# EAGLE board central (EAGLE 9.2.1)
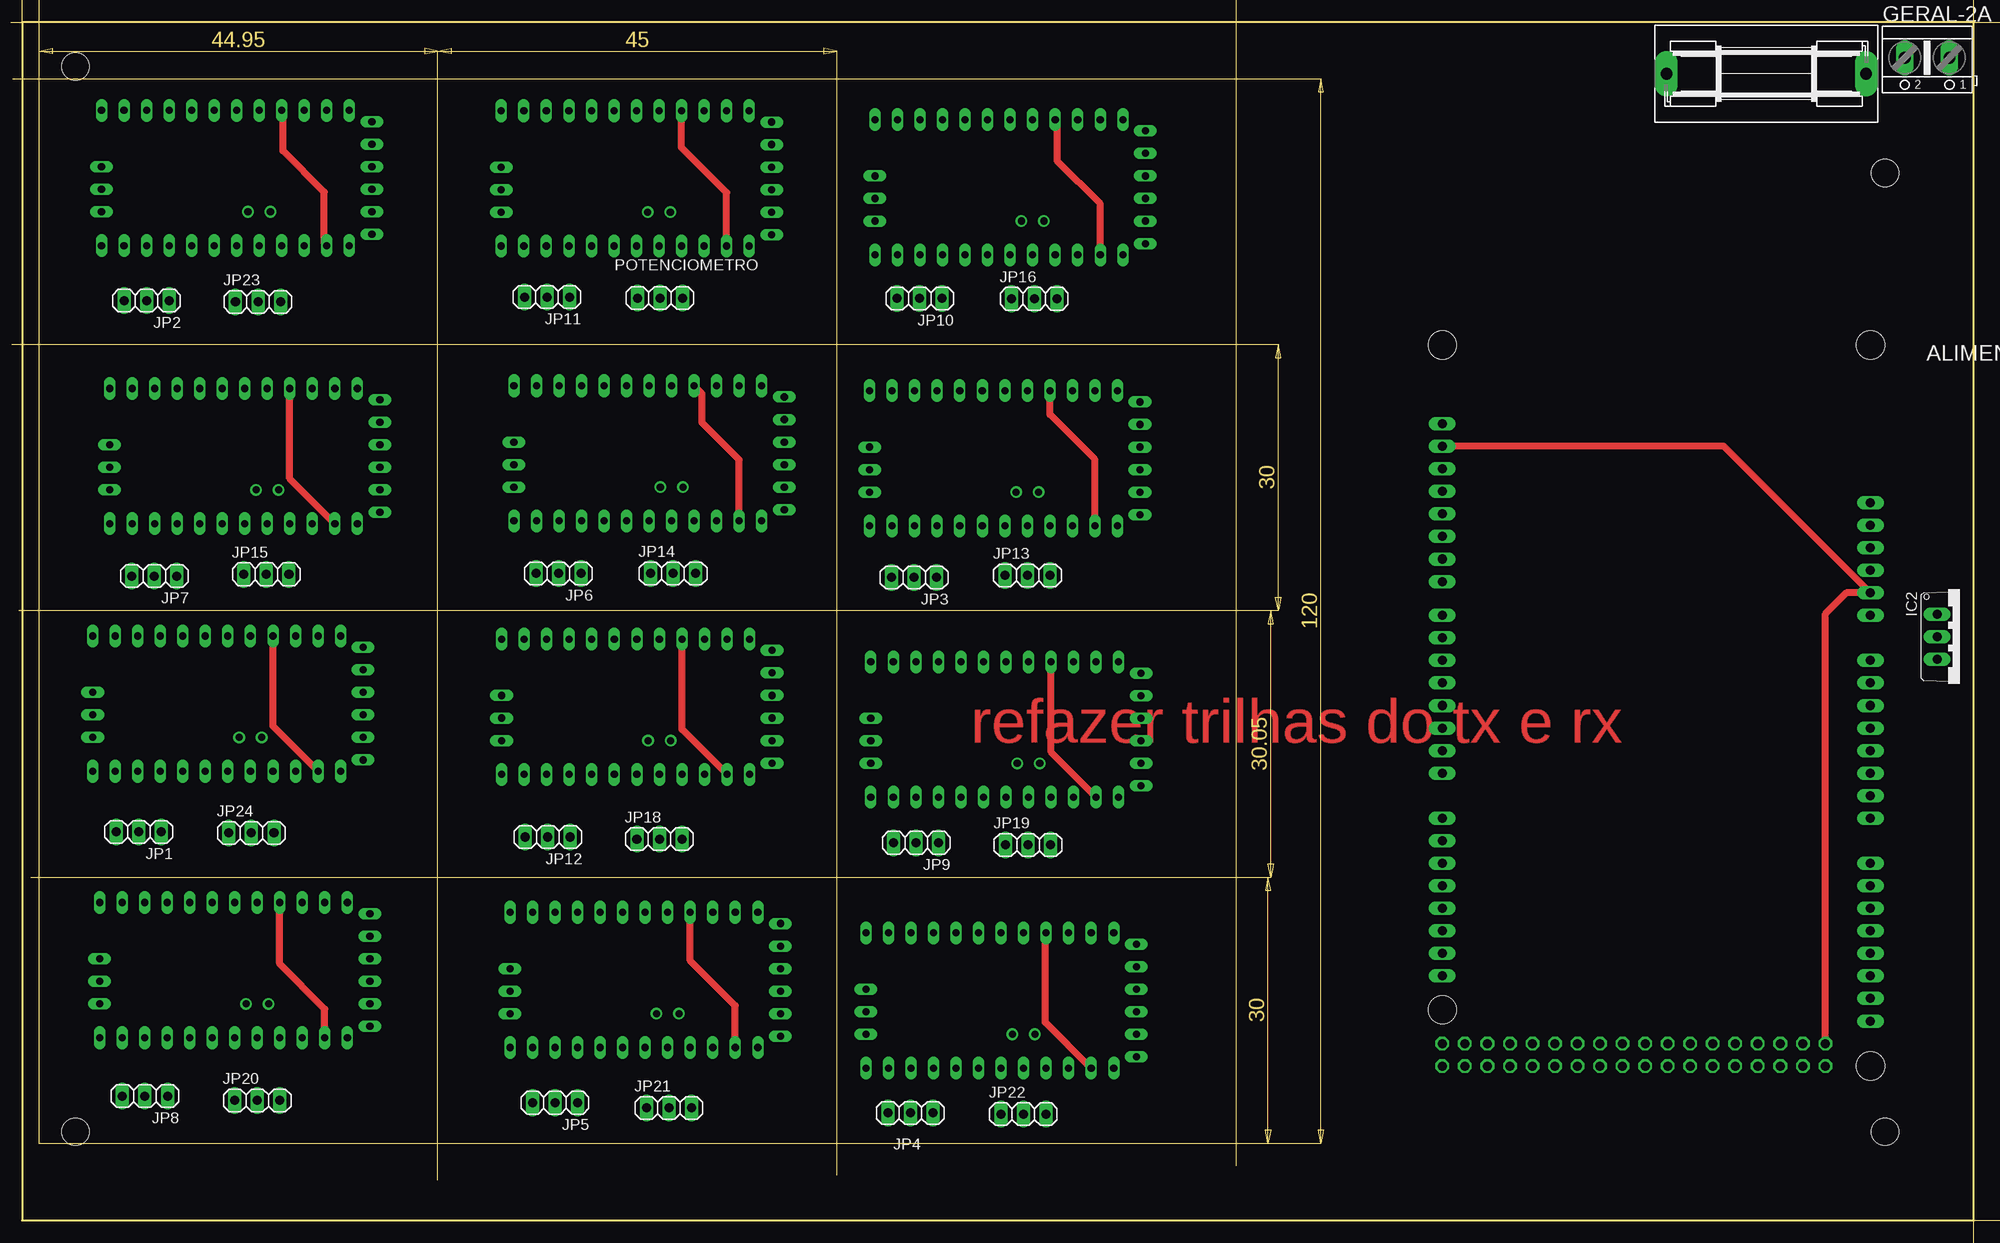
[diagram p0: board, top side]
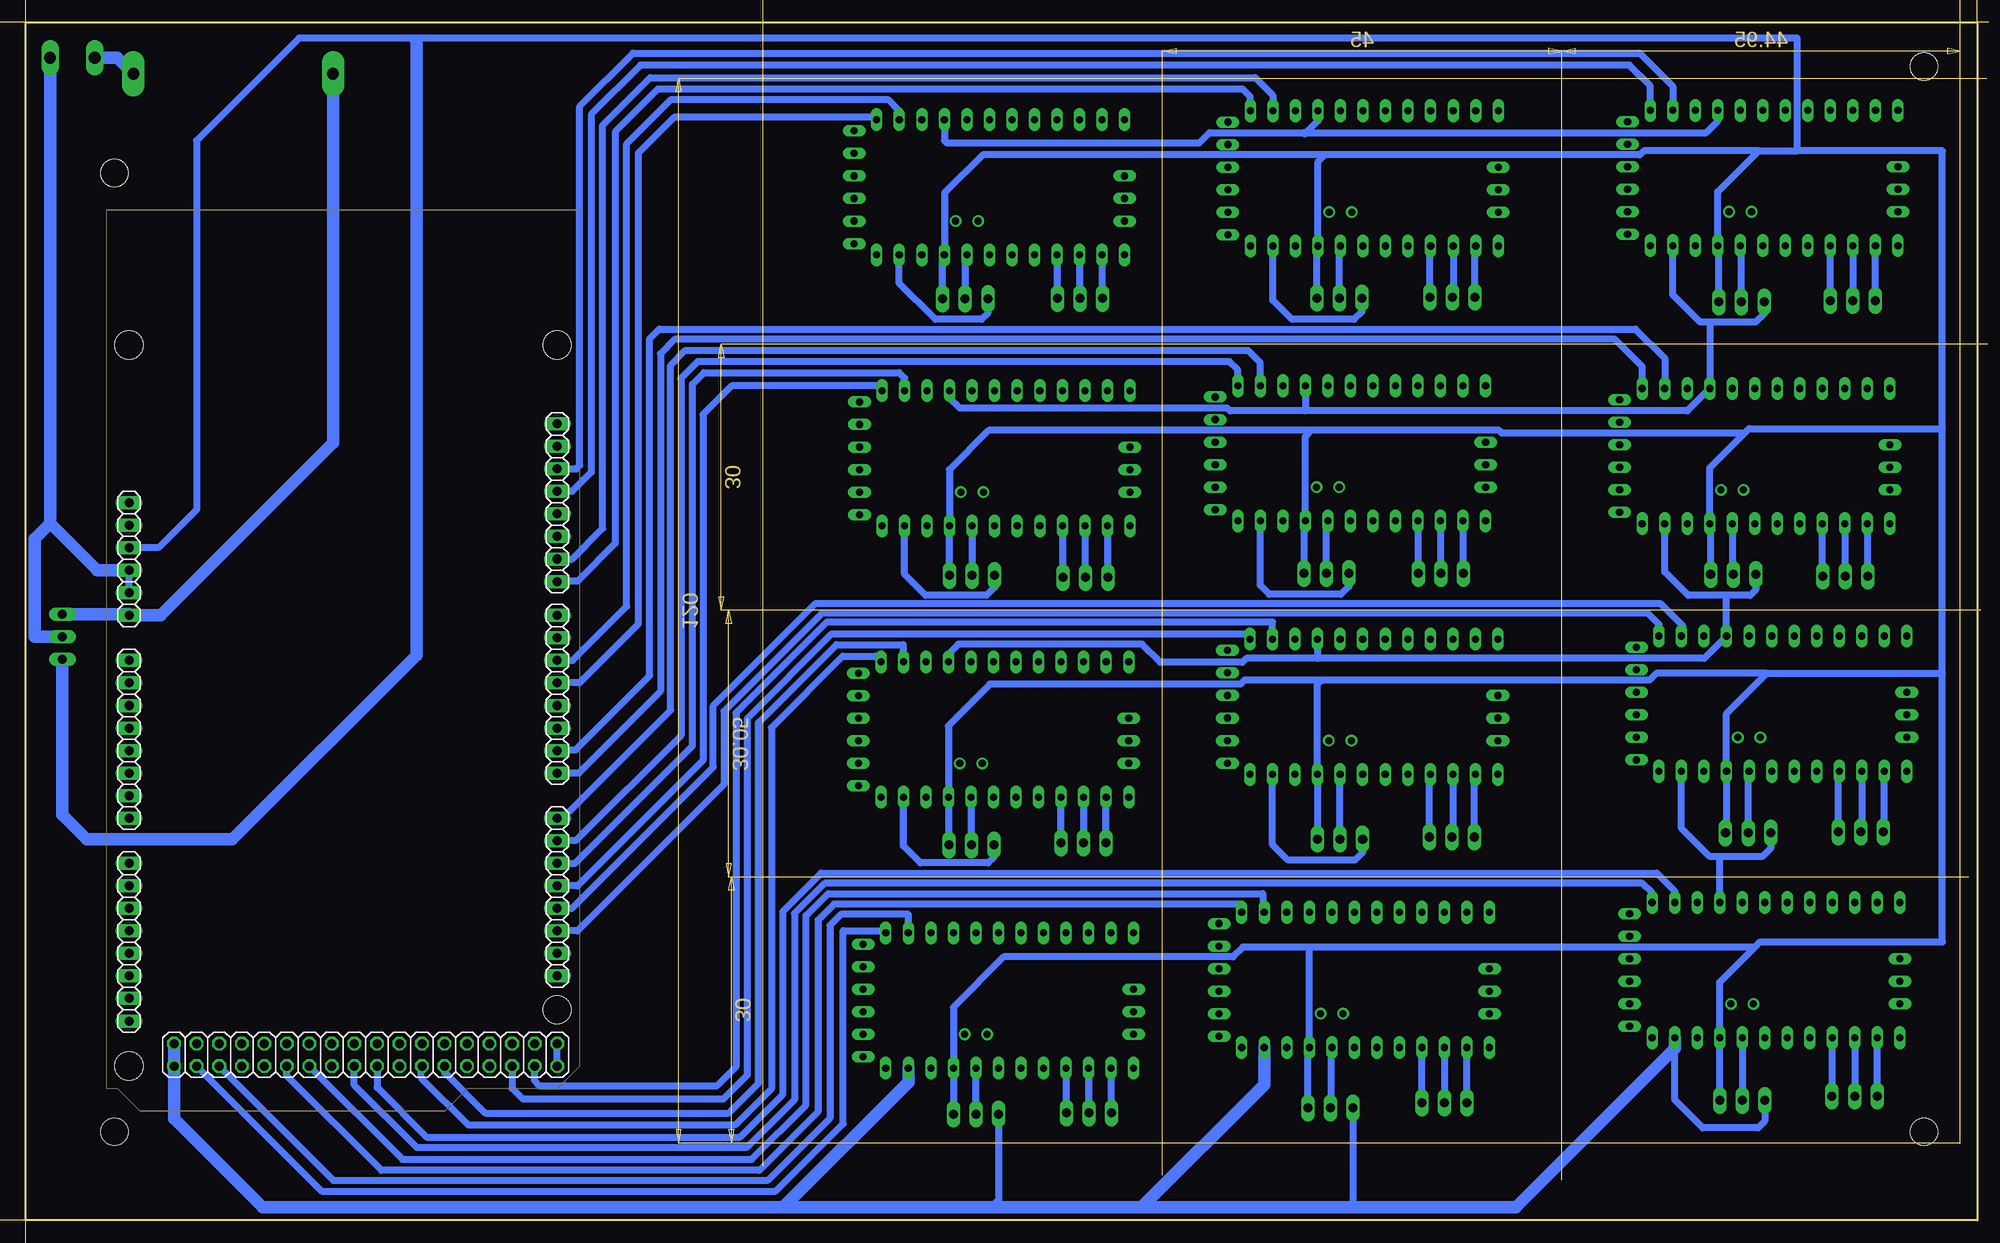
[diagram p1: board, bottom side, seen from below]

Size 220 x 135.05 mm. Coordinates in mm from the lower left corner, seen from the top.
Outline: 0,0 220,0 220,135.05 0,135.05 0,0
Copper layers (1*16): Top 0.035mm / dielectric 1.5mm / Bottom 0.035mm
Design rules "default": minimum track width 6mil, minimum drill 0.35mm, track to track 6mil, track to pad 6mil, pad to pad 6mil, via to via 6mil, smd to smd 6mil, copper to edge 40mil, drill to drill 6mil, minimum pad ring 10mil, minimum via ring 8mil, stop-mask expansion 4mil, vias tented up to drill 0mil, thermal gap 10mil
Holes 3.1 mm at 210,118.05 6,130.05 210,10 6,10
vRestrict: area 225.4,0 to 226,1.5; area 225.4,8.5 to 226,10; area 223.5,3.6 to 225.3,6.4; area 0,-2.6 to 1.5,-2; area 4.5,-2.6 to 6,-2; area 2.3,-1.9 to 3.7,-0.1; area 218.5,-6.5 to 220,-5.9; area 210,-6.5 to 211.5,-5.9; area 213.6,-8.4 to 216.4,-6.6; area 223.5,133.6 to 224.2,135.1; area 223.5,118 to 224.2,119.5; area 224.2,125.2 to 226,127.9; 3 more areas; 15 lines
Milling: area 1.9,147.9 to 3.4,148.6; area 135.4,147.9 to 136.9,148.6; area 67.3,148.7 to 71.5,150.4; area 146.1,8.7 to 146.7,10.2; area 146.1,127.2 to 146.7,128.7; area 144.2,66.6 to 146,70.8; area 1.9,131.5 to 3.4,132.1; area 45.4,131.5 to 46.9,132.1; area 20.9,132.2 to 27.8,134; area 46.9,131.5 to 48.4,132.1; area 90.4,131.5 to 91.9,132.1; area 68,132.2 to 70.7,134; 15 more areas; 27 lines

## Footprints (pad centres in the part's own frame; a part is rotated, then mirrored left to right if it is on the bottom)
AK500/2 = drill 1.321 long: 1 -2.515,0; 2 2.515,0
SH22,5A = drill 1.321 pad 2.54 long: 1 -11.252,0; 2 11.252,0
MEGA_ARDUINO_2 = drill 1.016 long: 1 33.02,2.54; 2 35.56,2.54; 3 38.1,2.54; 4 40.64,2.54; 5 43.18,2.54; 6 45.72,2.54; 7 50.8,2.54; 8 53.34,2.54; 9 55.88,2.54; 10 58.42,2.54; 11 60.96,2.54; 12 63.5,2.54; 13 66.04,2.54; 14 68.58,2.54; 15 73.66,2.54; 16 76.2,2.54; 17 78.74,2.54; 18 81.28,2.54; 19 83.82,2.54; 20 86.36,2.54; 21 88.9,2.54; 22 91.44,2.54; 23 86.36,50.8; 24 83.82,50.8; 25 81.28,50.8; 26 78.74,50.8; 27 76.2,50.8; 28 73.66,50.8; 29 71.12,50.8; 30 68.58,50.8; 31 63.5,50.8; 32 60.96,50.8; 33 58.42,50.8; 34 55.88,50.8; 35 53.34,50.8; 36 50.8,50.8; 37 48.26,50.8; 38 45.72,50.8; 39 41.91,50.8; 40 39.37,50.8; 41 36.83,50.8; 42 34.29,50.8; 43 31.75,50.8; 44 29.21,50.8; 45 26.67,50.8; 46 24.13,50.8 | drill 1.016 octagon: 47 93.98,50.8; 48 96.52,50.8; 49 93.98,48.26; 50 96.52,48.26; 51 93.98,45.72; 52 96.52,45.72; 53 93.98,43.18; 54 96.52,43.18; 55 93.98,40.64; 56 96.52,40.64; 57 93.98,38.1; 58 96.52,38.1; 59 93.98,35.56; 60 96.52,35.56; 61 93.98,33.02; 62 96.52,33.02; 63 93.98,30.48; 64 96.52,30.48; 65 93.98,27.94; 66 96.52,27.94; 67 93.98,25.4; 68 96.52,25.4; 69 93.98,22.86; 70 96.52,22.86; 71 93.98,20.32; 72 96.52,20.32; 73 93.98,17.78; 74 96.52,17.78; 75 93.98,15.24; 76 96.52,15.24; 77 93.98,12.7; 78 96.52,12.7; 79 93.98,10.16; 80 96.52,10.16; 81 93.98,7.62; 82 96.52,7.62 | hole 3.2: 15.24,50.8; 15.24,2.54; 90.17,50.8; 96.52,2.54
TO220V = drill 1.016 long: 1 -2.54,-2.54; 2 0,-2.54; 3 2.54,-2.54
1X03 = drill 1.016 long: 1 -2.54,0; 2 0,0; 3 2.54,0
ABK-PRO-MINI = drill 0.8 long: A0 10.16,-3.81; A1 10.16,-6.35; A2 10.16,-8.89; A3 10.16,-11.43; A6 3.81,-21.59; A7 6.35,-21.59; D2 -5.08,-3.81; D3 -5.08,-6.35; D4 -5.08,-8.89; D5 -5.08,-11.43; D6 -5.08,-13.97; D7 -5.08,-16.51; D8 -5.08,-19.05; D9 -5.08,-21.59; D10 10.16,-21.59; D11 10.16,-19.05; D12 10.16,-16.51; D13 10.16,-13.97; DTR 8.89,8.89; GND 10.16,3.81; GND1 -5.08,-1.27; GND2 -3.81,8.89; GND3 -1.27,8.89; GND4 1.27,-21.59; RAW 10.16,6.35; RST 10.16,1.27; RST1 -5.08,1.27; RX1 -5.08,3.81; RX1-1 3.81,8.89; TX0 -5.08,6.35; TX0-1 6.35,8.89; VCC 10.16,-1.27; VCC1 1.27,8.89 | drill 0.8: A4 6.35,-5.08; A5 6.35,-2.54

## Placement (x,y rotation side)
ALIMENTACAO  [AK500/2]  214.74,131.04 180 top
GERAL-2A  [SH22,5A]  196.61,129.24 180 top
IC1  [MEGA_ARDUINO_2]  210.89,113.92 270 bottom
IC2  7805TV  [TO220V]  218.4,65.8 270 top
JP1  [1X03]  13.14,43.8 180 top
JP2  [1X03]  14.02,103.66 180 top
JP3  [1X03]  100.54,72.48 180 top
JP4  [1X03]  100.13,12.12 180 top
JP5  [1X03]  60.07,13.27 180 top
JP6  [1X03]  60.46,72.92 180 top
JP7  [1X03]  14.9,72.62 180 top
JP8  [1X03]  13.84,14.02 180 top
JP9  [1X03]  100.78,42.57 180 top
JP10  [1X03]  101.17,103.92 180 top
JP11  [1X03]  59.16,104.07 180 top
JP12  [1X03]  59.25,43.22 180 top
JP13  [1X03]  113.33,72.71 0 top
JP14  [1X03]  73.37,72.93 0 top
JP15  [1X03]  27.53,72.83 0 top
JP16  [1X03]  114.09,103.88 0 top
JP18  [1X03]  71.83,42.98 0 top
JP19  [1X03]  113.39,42.33 0 top
JP20  [1X03]  26.5,13.53 0 top
JP21  [1X03]  72.91,12.68 0 top
JP22  [1X03]  112.87,11.98 0 top
JP23  [1X03]  26.58,103.53 0 top
JP24  [1X03]  25.84,43.68 0 top
POTENCIOMETRO  [1X03]  71.9,103.96 0 top
U$1  ABK-PRO-MINI  [ABK-PRO-MINI]  29.54,60.79 270 top
U$2  ABK-PRO-MINI  [ABK-PRO-MINI]  30.53,120.03 270 top
U$3  ABK-PRO-MINI  [ABK-PRO-MINI]  77.02,89 270 top
U$4  ABK-PRO-MINI  [ABK-PRO-MINI]  76.58,29.66 270 top
U$5  ABK-PRO-MINI  [ABK-PRO-MINI]  31.44,88.69 270 top
U$6  ABK-PRO-MINI  [ABK-PRO-MINI]  30.31,30.76 270 top
U$7  ABK-PRO-MINI  [ABK-PRO-MINI]  117.12,88.44 270 top
U$8  ABK-PRO-MINI  [ABK-PRO-MINI]  116.7,27.34 270 top
U$9  ABK-PRO-MINI  [ABK-PRO-MINI]  117.72,118.99 270 top
U$10  ABK-PRO-MINI  [ABK-PRO-MINI]  117.25,57.87 270 top
U$11  ABK-PRO-MINI  [ABK-PRO-MINI]  75.6,119.99 270 top
U$12  ABK-PRO-MINI  [ABK-PRO-MINI]  75.64,60.44 270 top

## Library data of the parts
ALIMENTACAO = con-ptr500; OC_FARNELL: unknown; OC_NEWARK: unknown
GERAL-2A = fuse; MPN: 0031.7701.11; OC_FARNELL: unknown; OC_NEWARK: 04F1224
IC1 = arduino
IC2 = linear
JP1-JP16 JP18-JP24 POTENCIOMETRO = pinhead
U$1-U$12 = arduino1

## Nets
+3V3: IC1.2
+5V: IC1.47 IC1.48
GND: ALIMENTACAO.1 IC1.4 IC1.5 IC1.45 IC1.81 IC1.82 IC2.2 JP13.1 JP14.1 JP15.1 JP16.1 JP18.1 JP19.1 JP20.1 JP21.1 JP22.1 JP23.1 JP24.1 POTENCIOMETRO.1 U$1.GND U$1.GND1 U$2.GND U$2.GND1 U$3.GND U$3.GND1 U$4.GND U$4.GND1 U$5.GND U$5.GND1 U$6.GND U$6.GND1 U$7.GND U$7.GND1 U$8.GND U$8.GND1 U$9.GND U$9.GND1 U$10.GND U$10.GND1 U$11.GND U$11.GND1 U$12.GND U$12.GND1
N$1: JP1.1 U$1.D13
N$2: JP1.2 U$1.D12
N$3: JP1.3 U$1.D11
N$4: JP3.1 U$7.D13
N$5: JP3.2 U$7.D12
N$6: JP3.3 U$7.D11
N$7: JP6.1 U$3.D13
N$8: JP6.2 U$3.D12
N$9: JP6.3 U$3.D11
N$10: JP7.1 U$5.D13
N$11: JP7.2 U$5.D12
N$12: JP7.3 U$5.D11
N$13: JP10.1 U$9.D13
N$14: JP10.2 U$9.D12
N$15: JP10.3 U$9.D11
N$16: JP11.1 U$11.D13
N$17: JP11.2 U$11.D12
N$18: JP11.3 U$11.D11
N$19: JP12.1 U$12.D13
N$20: JP12.2 U$12.D12
N$21: JP12.3 U$12.D11
N$22: JP9.1 U$10.D13
N$23: JP9.2 U$10.D12
N$24: JP9.3 U$10.D11
N$25: JP8.1 U$6.D13
N$26: JP8.2 U$6.D12
N$27: JP8.3 U$6.D11
N$28: JP5.1 U$4.D13
N$29: JP5.2 U$4.D12
N$30: JP5.3 U$4.D11
N$31: JP4.1 U$8.D13
N$32: JP4.2 U$8.D12
N$33: JP4.3 U$8.D11
N$34: JP2.1 U$2.D13
N$35: JP2.2 U$2.D12
N$36: JP2.3 U$2.D11
N$37: JP13.2 U$7.A0
N$38: JP24.2 U$1.A0
N$39: JP14.2 U$3.A0
N$40: JP15.2 U$5.A0
N$41: JP16.2 U$9.A0
N$42: POTENCIOMETRO.2 U$11.A0
N$43: JP18.2 U$12.A0
N$44: JP19.2 U$10.A0
N$45: JP20.2 U$6.A0
N$46: JP21.2 U$4.A0
N$47: JP22.2 U$8.A0
N$48: JP23.2 U$2.A0
N$62: ALIMENTACAO.2 GERAL-2A.1
RX1: IC1.26 U$1.RX1
RX2: IC1.28 U$7.RX1
RX3: IC1.30 U$3.RX1
RX4: IC1.32 U$5.RX1
RX5: IC1.36 U$9.RX1
RX6: IC1.40 U$11.RX1
RX7: IC1.44 U$2.RX1
RX8: IC1.78 U$8.RX1
RX9: IC1.70 U$4.RX1
RX10: IC1.64 U$6.RX1
RX11: IC1.58 U$10.RX1
RX12: IC1.50 U$12.RX1
TX1: IC1.25 U$1.TX0
TX2: IC1.27 U$7.TX0
TX3: IC1.29 U$3.TX0
TX4: IC1.31 U$5.TX0
TX5: IC1.35 U$9.TX0
TX6: IC1.39 U$11.TX0
TX7: IC1.43 U$2.TX0
TX8: IC1.80 U$8.TX0
TX9: IC1.72 U$4.TX0
TX10: IC1.66 U$6.TX0
TX11: IC1.60 U$10.TX0
TX12: IC1.52 U$12.TX0
VCC: IC1.3 IC2.3 JP13.3 JP14.3 JP15.3 JP16.3 JP18.3 JP19.3 JP20.3 JP21.3 JP22.3 JP23.3 JP24.3 POTENCIOMETRO.3 U$1.VCC U$2.VCC U$3.VCC U$4.VCC U$5.VCC U$6.VCC U$7.VCC U$8.VCC U$9.VCC U$10.VCC U$11.VCC U$12.VCC
VIN: GERAL-2A.2 IC1.6 IC2.1

## Tracks (layer width: path | path; a pad name or v marks a point on that pad's centre or on a via)
+5V
  Bottom 0.813: IC1.48 IC1.47
GND
  Top 0.813: IC1.45 191.84,87.25 IC1.5 208.29,70.8 205.7,70.8 203.27,68.37 IC1.81 | U$7.GND 120.93,85.77 115.85,90.85 U$7.GND1 | U$9.GND 121.53,114.57 116.7,119.4 116.7,123.82 U$9.GND1 | U$11.GND 79.41,115.84 74.33,120.92 U$11.GND1 | U$2.GND 34.05,110.16 34.05,115.9 29.4,120.55 29.4,124.97 U$2.GND1 | U$3.GND 80.83,85.72 76.6,89.95 76.6,93.23 U$3.GND1 | U$1.GND 28.27,55.71 U$1.GND1 | U$12.GND 74.37,55.36 U$12.GND1 | U$10.GND 115.98,52.79 U$10.GND1 | U$8.GND 115.35,22.34 115.35,32.34 U$8.GND1 | U$4.GND 80.39,24.21 75.31,29.29 U$4.GND1 | U$6.GND 34.12,23.83 29.04,28.91 U$6.GND1 | U$5.GND 30.17,83.61 U$5.GND1
  Bottom 0.813: JP16.1 111.55,102.25 112.25,101.55 117.45,101.55 121.53,105.63 U$9.GND | POTENCIOMETRO.1 69.36,102.44 70.25,101.55 77.25,101.55 79.41,103.71 U$11.GND | JP23.1 24.04,102.21 25,101.25 30,101.25 | 30,101.25 31.25,101.25 34.34,104.34 U$2.GND | JP15.1 24.99,71.06 25.6,70.45 28.25,70.45 | 28.25,70.45 32.6,70.45 35.25,73.1 U$5.GND | JP14.1 70.83,71.47 71.75,70.55 79.8,70.55 80.83,71.58 U$3.GND | JP13.1 110.79,71.36 111.7,70.45 118.55,70.45 120.93,72.83 U$7.GND | JP18.1 69.29,41.46 70.15,40.6 77.7,40.6 79.45,42.35 U$12.GND | JP19.1 110.9,42.28 110.9,40.9 111.5,40.3 119.15,40.3 121.06,42.21 U$10.GND | JP24.1 23.3,41.95 24.25,41 29.25,41 | 29.25,41 30.15,41 33.35,44.2 U$1.GND | JP20.1 23.96,11.19 24.7,10.45 30.95,10.45 34.12,13.62 U$6.GND | JP21.1 70.37,1.83 70.7,1.5 | JP22.1 110.33,2.32 111.15,1.5 | U$9.GND1 116.45,121.7 116.2,121.45 87.7,121.45 86.55,122.6 75.95,122.6 | 75.95,122.6 75.8,122.45 74.33,123.92 U$11.GND1 | 75.95,122.6 30.55,122.6 29.26,123.89 U$2.GND1 | 30,101.25 30.17,101.08 U$5.GND1 32.69,91.25 75.85,91.25 | U$7.GND1 115.85,92.8 115.9,92.75 114.7,91.55 84.55,91.55 84.25,91.25 75.85,91.25 | U$3.GND1 75.75,91.35 75.85,91.25 | 28.25,70.45 28.27,70.43 U$1.GND1 30.79,63.35 74.35,63.35 | U$10.GND1 115.98,63.82 114.85,64.95 94.15,64.95 92.1,62.9 82.85,62.9 82.4,63.35 74.35,63.35 | U$12.GND1 74.37,63.37 74.35,63.35 | U$6.GND1 29.04,40.79 29.25,41 | IC1.5 IC1.4
  Bottom 1.4: ALIMENTACAO.1 217.25,78.58 | 217.25,78.58 211.95,73.28 IC1.4 | U$8.GND 120.51,15.59 134.6,1.5 | 134.6,1.5 193.3,1.5 203.27,11.47 IC1.82 IC1.81 | U$4.GND 80.39,15.31 94.2,1.5 | 94.2,1.5 111.15,1.5 134.6,1.5 | U$6.GND 34.12,19.4 52.02,1.5 70.7,1.5 94.2,1.5 | IC2.2 219,65.8 219,76.84 217.25,78.58
N$1
  Bottom 0.813: JP1.1 15.68,50.52 U$1.D13
N$2
  Bottom 0.813: U$1.D12 13.03,44.57 13.3,44.3 13.3,43.96 JP1.2
N$3
  Bottom 0.813: JP1.3 10.49,43.91 U$1.D11
N$4
  Bottom 0.813: JP3.1 103.08,78.21 U$7.D13
N$5
  Bottom 0.813: U$7.D12 100.61,72.55 JP3.2
N$6
  Bottom 0.813: JP3.3 98,78.21 U$7.D11
N$7
  Bottom 0.813: JP6.1 63,78.79 U$3.D13
N$8
  Bottom 0.813: U$3.D12 60.51,72.97 JP6.2
N$9
  Bottom 0.813: JP6.3 57.92,78.79 U$3.D11
N$10
  Bottom 0.813: JP7.1 17.47,72.65 U$5.D13
N$11
  Bottom 0.813: U$5.D12 14.93,72.65 JP7.2
N$12
  Bottom 0.813: JP7.3 12.36,78.5 U$5.D11
N$13
  Bottom 0.813: JP10.1 103.71,108.79 U$9.D13
N$14
  Bottom 0.813: JP10.2 101.17,108.79 U$9.D12
N$15
  Bottom 0.813: JP10.3 98.63,108.79 U$9.D11
N$16
  Bottom 0.813: JP11.1 61.7,109.76 U$11.D13
N$17
  Bottom 0.813: U$11.D12 59.09,104.14 JP11.2
N$18
  Bottom 0.813: JP11.3 56.62,109.76 U$11.D11
N$19
  Bottom 0.813: JP12.1 61.79,50.16 U$12.D13
N$20
  Bottom 0.813: U$12.D12 59.13,43.34 JP12.2
N$21
  Bottom 0.813: JP12.3 56.71,50.16 U$12.D11
N$22
  Bottom 0.813: JP9.1 103.32,47.67 U$10.D13
N$23
  Bottom 0.813: U$10.D12 100.74,42.61 JP9.2
N$24
  Bottom 0.813: JP9.3 98.24,47.67 U$10.D11
N$25
  Bottom 0.813: JP8.1 16.34,14.06 U$6.D13
N$26
  Bottom 0.813: U$6.D12 13.84,20.56 JP8.2
N$27
  Bottom 0.813: JP8.3 11.3,20.56 U$6.D11
N$28
  Bottom 0.813: JP5.1 U$4.D13
N$29
  Bottom 0.813: U$4.D12 JP5.2
N$30
  Bottom 0.813: JP5.3 U$4.D11
N$31
  Bottom 0.813: JP4.1 102.67,17.12 U$8.D13
N$32
  Bottom 0.813: U$8.D12 100.19,12.18 JP4.2
N$33
  Bottom 0.813: JP4.3 97.59,17.04 97.69,17.14 U$8.D11
N$34
  Bottom 0.813: JP2.1 U$2.D13
N$35
  Bottom 0.813: U$2.D12 JP2.2
N$36
  Bottom 0.813: JP2.3 U$2.D11
N$37
  Bottom 0.813: U$7.A0 113.31,72.73 JP13.2
N$38
  Bottom 0.813: JP24.2 25.84,50.52 U$1.A0
N$39
  Bottom 0.813: JP14.2 73.37,78.68 U$3.A0
N$40
  Bottom 0.813: U$5.A0 27.63,72.93 JP15.2
N$41
  Bottom 0.813: U$9.A0 114.09,108.65 JP16.2
N$42
  Bottom 0.813: POTENCIOMETRO.2 71.9,109.72 U$11.A0
N$43
  Bottom 0.813: JP18.2 U$12.A0
N$44
  Bottom 0.813: JP19.2 113.39,47.04 113.45,47.1 U$10.A0
N$45
  Bottom 0.813: U$6.A0 JP20.2
N$46
  Bottom 0.813: U$4.A0 72.87,19.4 72.87,12.72 JP21.2
N$47
  Bottom 0.813: JP22.2 112.87,17.16 U$8.A0
N$48
  Bottom 0.813: JP23.2 26.58,109.73 U$2.A0
N$62
  Bottom 1.4: ALIMENTACAO.2 209.66,131.04 GERAL-2A.1
RX1
  Bottom 0.813: IC1.26 158.42,35.18 142.5,51.1 142.5,58 130.95,69.55 35.75,69.55 33.2,67 33.2,66.02 U$1.RX1
RX2
  Bottom 0.813: IC1.28 158.09,40.26 144.85,53.5 144.85,94.25 143.55,95.55 121.55,95.55 120.93,94.93 U$7.RX1
RX3
  Bottom 0.813: IC1.30 159.49,45.34 147.3,57.53 147.3,96.4 145.65,98.05 82.2,98.05 80.85,96.7 80.85,94.1 U$3.RX1
RX4
  Bottom 0.813: IC1.32 160,53.05 158,53.05 149.65,61.4 149.65,99.4 148.6,100.45 38.55,100.45 35.25,97.15 U$5.RX1
RX5
  Bottom 0.813: IC1.36 158.33,63.12 152.25,69.2 152.25,121.35 147.25,126.35 122.8,126.35 121.53,125.08 U$9.RX1
RX6
  Bottom 0.813: IC1.40 158.4,74.55 154.95,78 154.95,123.45 149.6,128.8 81.4,128.8 79.41,126.81 U$11.RX1
RX7
  Bottom 0.813: IC1.44 157.94,84.71 157.55,85.1 157.55,125.55 151.55,131.55 38.05,131.55 34.34,127.84 U$2.RX1
RX8
  Bottom 0.813: IC1.78 185.29,4.5 136.4,4.5 129.35,11.55 129.35,33.25 128.1,34.5 120.51,34.5 U$8.RX1
RX9
  Bottom 0.813: IC1.70 177.53,6.9 138.15,6.9 132.05,13 132.05,34.35 129.55,36.85 80.55,36.85 80.55,34.9 U$4.RX1
RX10
  Bottom 0.813: IC1.64 180.41,15.01 174.8,9.4 139.5,9.4 134.65,14.25 134.65,34.85 130.35,39.15 36.15,39.15 34.12,37.12 U$6.RX1
RX11
  Bottom 0.813: IC1.58 172.79,16.69 168.2,12.1 140.75,12.1 137.4,15.45 137.4,56.1 128.6,64.9 121.06,64.9 U$10.RX1
RX12
  Bottom 0.813: U$12.RX1 79.45,67.45 129.7,67.45 139.95,57.2 139.95,17.35 142.15,15.15 162.05,15.15 162.63,15.73 IC1.50
TX1
  Bottom 0.813: U$1.TX0 35.89,67.19 37.15,68.45 130.25,68.45 141.3,57.4 141.3,49.15 157.81,32.64 IC1.25
TX2
  Bottom 0.813: U$7.TX0 124.02,94.07 140.43,94.07 143.65,90.85 143.65,51.85 157.78,37.72 IC1.27
TX3
  Bottom 0.813: U$3.TX0 83.37,95.87 84.3,96.8 144.25,96.8 146.15,94.9 146.15,54.65 158,42.8 IC1.29
TX4
  Bottom 0.813: U$5.TX0 37.79,96.24 40.85,99.3 146.85,99.3 148.45,97.7 148.45,59.65 157.68,50.42 IC1.31
TX5
  Bottom 0.813: U$9.TX0 124.07,124.32 146.93,124.32 150.95,120.3 150.95,67.2 157.57,60.58 IC1.35
TX6
  Bottom 0.813: U$11.TX0 81.95,126.65 82.8,127.5 148.75,127.5 153.55,122.7 153.55,76.3 157.8,72.05 160.05,72.05 IC1.39
TX7
  Bottom 0.813: U$2.TX0 36.88,127.88 39.2,130.2 150.7,130.2 156.25,124.65 156.25,84.3 158.38,82.17 IC1.43
TX8
  Bottom 0.813: IC1.80 186.63,3.3 135.45,3.3 127.85,10.9 127.85,32.67 123.3,32.67 U$8.TX0
TX9
  Bottom 0.813: U$4.TX0 82.93,35.65 128.9,35.65 130.7,33.85 130.7,12.25 137.3,5.65 179.9,5.65 190.57,16.32 IC1.72
TX10
  Bottom 0.813: U$6.TX0 36.66,36.91 37.75,38 129.95,38 133.35,34.6 133.35,13.6 138.75,8.2 175.9,8.2 182.95,15.25 IC1.66
TX11
  Bottom 0.813: IC1.60 175.4,17.33 175.4,16.05 170.1,10.75 140.05,10.75 135.95,14.85 135.95,55.55 127.9,63.6 124.25,63.6 U$10.TX0
TX12
  Bottom 0.813: IC1.52 165.17,14.9 163.97,13.7 141.35,13.7 138.65,16.4 138.65,56.6 129.15,66.1 81.99,66.1 U$12.TX0
VCC
  Bottom 0.813: JP16.3 116.63,108.65 U$9.VCC 116.4,108.88 116.4,115.8 112.1,120.1 73.55,120.1 | POTENCIOMETRO.3 74.44,109.72 U$11.VCC 74.33,119.32 73.55,120.1 | JP23.3 29.12,109.73 U$2.VCC 29.26,115.94 24.65,120.55 | JP15.3 30.07,78.43 U$5.VCC 30.17,84.83 26.25,88.75 | JP14.3 75.91,78.68 U$3.VCC 75.75,88.35 75.05,89.05 | JP13.3 115.87,78.26 | 115.87,78.26 U$7.VCC | JP18.3 U$12.VCC 74.37,60.43 73.9,60.9 | JP19.3 115.98,42.38 U$10.VCC 116,47.73 116,55.75 111.3,60.45 83.05,60.45 82.6,60.9 73.9,60.9 | JP21.3 75.45,19.36 U$4.VCC 75.31,30.59 75.1,30.8 | JP20.3 U$6.VCC 29.04,26.86 25.1,30.8 | JP22.3 115.43,12 U$8.VCC 115.43,24.02 109.75,29.7 83.9,29.7 82.8,30.8 75.1,30.8 | JP24.3 28.27,43.79 U$1.VCC 28.27,57.13 23.75,61.65 | 3.95,61.65 3.95,31.4 24.5,31.4 25.1,30.8 | 3.95,61.65 3.95,89.25 | 3.95,89.25 3.95,120.55 20.3,120.55 | 20.3,120.55 20.3,133.25 176.6,133.25 | 176.6,133.25 189.2,133.25 200.75,121.7 200.75,80.1 205.03,75.82 IC1.3 | 25.1,30.8 75.1,30.8 | 23.75,61.65 3.95,61.65 | 23.75,61.65 36.2,61.65 36.95,60.9 73.9,60.9 | 3.95,89.25 25.75,89.25 26.25,88.75 | 26.25,88.75 53.6,88.75 53.9,89.05 75.05,89.05 | 115.87,78.26 115.87,84.63 111.45,89.05 75.05,89.05 | 24.65,120.55 20.3,120.55 | 24.65,120.55 37.6,120.55 38.05,120.1 73.55,120.1 | 175.95,132.6 176.6,133.25
  Bottom 1.4: IC2.3 215.86,45.71 213.1,42.95 196.7,42.95 175.95,63.7 175.95,132.6
VIN
  Bottom 1.4: GERAL-2A.2 185.36,87.64 204.8,68.2 IC1.6 208.35,68.34 IC2.1

## Text on the board
Top: refazer trilhas do tx e rx